# Allegro board design_1040.brd
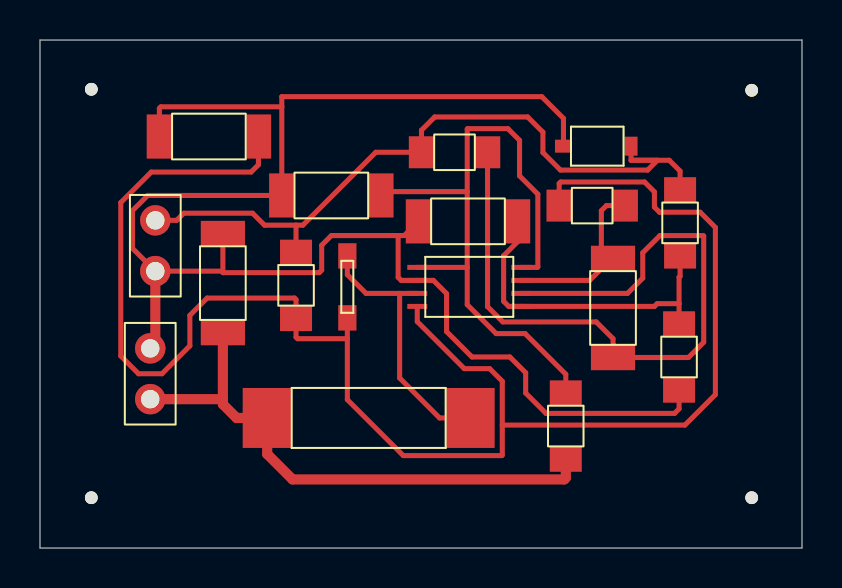
[diagram p0: board, top side]
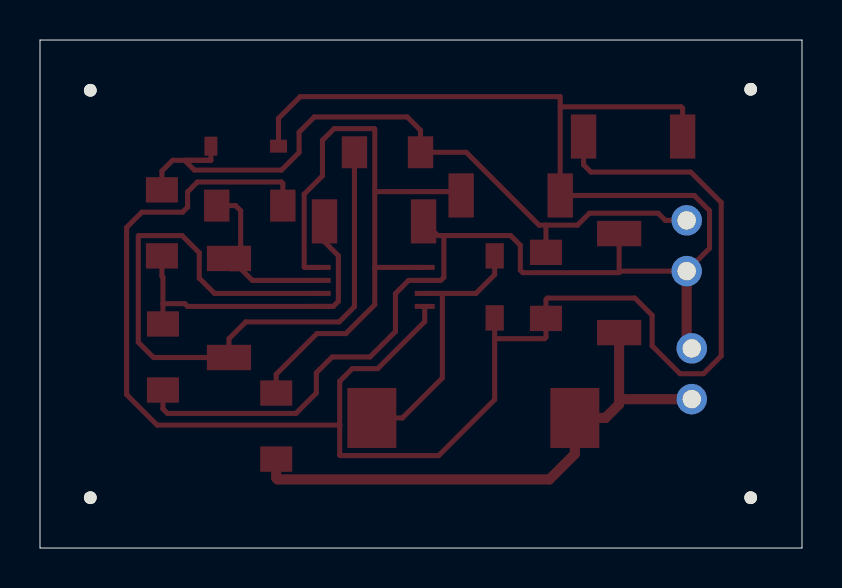
[diagram p1: board, bottom side, seen from below]

Outline 38.1 x 25.4 mm; copper layers: TOP, BOTTOM. Coordinates in mm from the lower left corner of the outline.
Outline path: 0,25.4 38.1,25.4 38.1,0 0,0 0,25.4

## Placement (name value [footprint] x y rotation side)
C2  1nF  [SMDCAP]  21.46 16.33 0 top
C4  1nF  [SMDCAP]  14.63 17.63 0 top
CF1  1u  [SMDCAP]  28.65 12.06 90 top
CIN1  4.7uF  [SMDCAP]  9.14 13.18 270 top
COUT1  10uF  [SMDCAP]  8.51 20.57 0 top
DOUT  SMM4F5.0  [DIODE]  27.86 20.09 0 top
DS  STPS0560Z  [SOD123]  15.37 13.06 270 top
J1  CON2  [JUMPER2]  5.51 7.44 90 top
J2  CON2  [JUMPER2]  5.77 16.38 270 top
L1  10uH  [INDUCTOR]  16.43 6.5 0 top
NOREF  -  [unnamed]  2.57 22.94 0 top
NOREF#2  -  [unnamed]  35.59 22.89 0 top
NOREF#3  -  [unnamed]  35.59 2.51 0 top
NOREF#4  -  [unnamed]  2.57 2.51 0 top
R1  390k  [SMDRES]  32 16.26 90 top
R3  1k  [SMDRES]  26.29 6.1 270 top
R11  130k  [SMDRES]  31.95 9.55 90 top
RF1  1k  [SMDRES]  27.61 17.12 180 top
RF2  1k  [SMDRES]  20.73 19.79 180 top
RS1  180m  [SMDRES]  12.8 13.13 90 top
U1  spv1040  [SPV1040_LAB]  21.46 13.06 0 top

## Library data of the parts
C2 C4 CF1 CIN1 COUT1 = C: Tolerance: ***; User Part Number: ***
DOUT DS = mmsz5221_0.bt1
J1 J2 = CON2: User Part Number: ***
L1 = L
R1 R3 R11 RF1 RF2 RS1 = R: Tolerance: ***; User Part Number: ***
U1 = SPV1040

## Footprints (pads in the part's own frame, mm; a bottom-side part is the same pattern mirrored in y, then rotated)
DIODE
  rect 0.85x0.65 smd: 1(-1.69,0)
  rect 0.65x0.95 smd: 2(1.69,0)
INDUCTOR
  rect 2.45x3 smd: 1(-5.075,0) 2(5.075,0)
JUMPER2
  round 1.524 hole 0.914: 1(0,0) 2(2.54,0)
SMDCAP
  rect 1.27x2.21 smd: 1(-2.54,0) 2(2.413,0)
SMDRES
  rect 1.27x1.6 smd: 1(-1.651,0) 2(1.651,0)
SOD123
  rect 1.27x0.914 smd: 1(-1.55,0) 2(1.55,0)
SPV1040_LAB
  rect 1x0.25 smd: 1(-2.6,0.975) 2(-2.6,0.325) 3(-2.6,-0.325) 4(-2.6,-0.975) 5(2.6,-0.975) 6(2.6,-0.325) 7(2.6,0.325) 8(2.6,0.975)
unnamed
  round 0.635 hole 3.175 unplated: (0,0)

## Nets
GND_POWER: C2.1 C4.1 CIN1.1 COUT1.1 DOUT.1(A) J1.2 J2.2 R11.1 U1.2(GND)
N00099: CIN1.2 J1.1 L1.1 R3.2
N00268: DS.1(A) L1.2 U1.3(LX)
N00274: C4.2 R3.1 U1.1(MPP_SET) U1.8(XSHUT)
N00467: CF1.2 RF1.1 U1.7(ICTRL_PLUS)
N00476: CF1.1 RF2.1 U1.6(ICTRL_MINUS)
N00498: DOUT.2(K) J2.1 R1.2 RF2.2 RS1.2
N00508: COUT1.2 DS.2(K) RF1.2 RS1.1 U1.4(VOUT)
N00553: C2.2 R1.1 R11.2 U1.5(VCTRL)

## Routing (per net, layer and track width the routed paths; a pad name or vN(x,y) marks a point on that pad's centre or on a via; arc(x,y) is an arc through that point)
GND_POWER: length 82.3
  TOP w0.254: DOUT.1 26.17,21.48 25.09,22.57 12.09,22.57 12.09,22.06 ; 17.91,15.62 18.21,15.62 C2.1 ; 17.91,15.62 14.57,15.62 14.08,15.14 14.08,13.89 13.96,13.77 9.14,13.77 9.14,13.84 ; 17.91,15.62 17.91,13.53 18.06,13.38 U1.2 19.67,13.38 20.33,12.72 20.33,10.82 21.6,9.55 23.49,9.55 24.28,8.76 24.28,7.75 25.3,6.73 31.72,6.73 31.95,6.96 R11.1 ; 5.77,10.24 J1.2 ; 9.14,13.84 5.77,13.84 4.62,14.99 4.62,16.87 5.38,17.63 C4.1 12.09,22.06 ; 9.14,13.84 CIN1.1 ; 12.09,22.06 6.05,22.06 5.97,21.98 COUT1.1
  TOP w0.508: 5.77,13.84 5.77,10.24
N00099: length 27.9
  TOP w0.508: 9.14,7.44 9.14,7.19 9.83,6.5 L1.1 11.36,4.7 12.63,3.43 26.21,3.43 26.29,3.51 R3.2 ; 9.14,7.44 J1.1 ; 9.14,7.44 CIN1.2
N00268: length 13.4
  TOP w0.254: 17.98,12.73 17.98,8.5 19.98,6.5 L1.2 ; 17.98,12.73 16.3,12.73 15.37,13.67 DS.1 ; 17.98,12.73 U1.3
N00274: length 33.4
  TOP w0.254: C4.2 17.23,17.82 21.36,17.82 ; R3.1 26.29,8.69 24.26,10.72 22.81,10.72 21.36,12.17 21.36,14.03 ; 21.36,17.82 21.36,14.03 ; 21.36,17.82 21.36,20.94 21.39,20.97 23.39,20.97 23.98,20.38 23.98,18.61 24.89,17.69 24.89,14.06 24.87,14.03 U1.8 ; U1.1 21.36,14.03
N00467: length 9.5
  TOP w0.254: CF1.2 28.65,14.04 28.58,13.96 28.07,13.96 ; U1.7 27.48,13.38 28.07,13.96 ; 28.07,13.96 28.07,16.87 28.32,17.12 RF1.1
N00476: length 36.8
  TOP w0.254: U1.6 29.38,12.73 30.14,13.49 30.14,14.76 31,15.62 33.16,15.62 33.19,15.6 33.19,10.29 32.42,9.52 CF1.1 28.65,10.46 27.81,11.3 23.14,11.3 22.38,12.07 RF2.1
N00498: length 37.3
  TOP w0.254: DOUT.2 29.55,19.39 ; 29.55,19.39 31.47,19.39 32,18.85 R1.2 ; 29.55,19.39 30.87,19.39 30.38,18.9 26.02,18.9 25.15,19.77 25.15,20.79 24.38,21.55 19.74,21.55 19.08,20.89 RF2.2 16.79,19.79 13.14,16.14 12.8,16.14 ; RS1.2 12.8,16.14 ; 12.8,16.14 11.23,16.14 10.63,16.74 7.19,16.74 6.83,16.38 J2.1
N00508: length 85.8
  TOP w0.254: 15.37,10.46 15.37,7.42 18.16,4.62 23.09,4.62 23.11,4.65 23.11,6.15 ; 15.37,10.46 12.88,10.46 12.8,10.54 RS1.1 12.8,12.42 12.73,12.5 8.36,12.5 7.49,11.63 7.49,10.11 6.1,8.71 4.93,8.71 4.04,9.6 4.04,17.27 5.56,18.8 10.55,18.8 10.92,19.16 COUT1.2 ; 15.37,10.46 DS.2 ; RF1.2 25.96,18.22 26.04,18.3 30.23,18.3 30.72,17.81 30.72,17.04 30.98,16.79 33.01,16.79 33.77,16.03 33.77,7.67 32.25,6.15 23.11,6.15 ; 23.11,6.15 23.11,8.34 22.48,8.97 21.21,8.97 18.86,11.32 U1.4
N00553: length 16.6
  TOP w0.254: 31.95,12.22 31.95,13.54 32,13.59 R1.1 ; 31.95,12.22 R11.2 ; 31.95,12.22 30.86,12.22 30.72,12.08 U1.5 23.44,12.08 23.18,12.33 23.18,14.61 23.88,15.31 C2.2
